# EAGLE board simon (EAGLE 6.4)
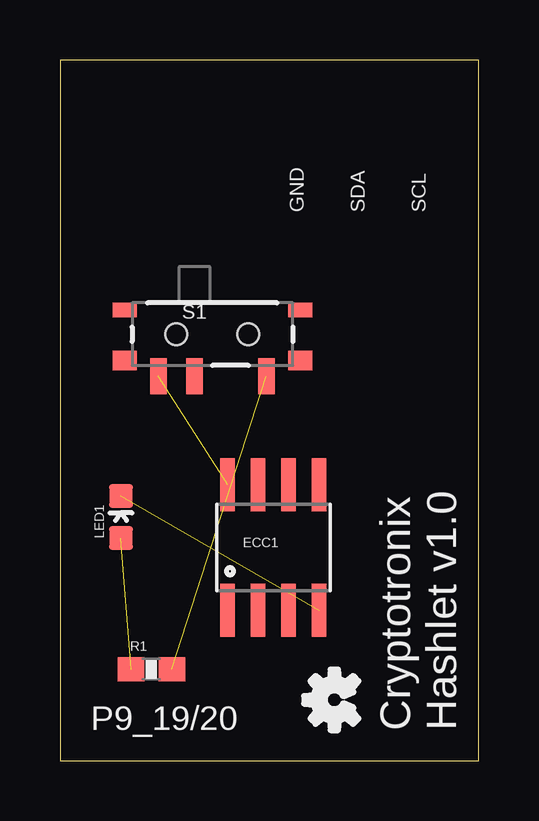
[diagram p0: board, top side]

Size 17.45 x 29.2 mm. Coordinates in mm from the lower left corner, seen from the top.
Outline: 0,0 17.45,0 17.45,29.2 0,29.2 0,0
Copper layers (1*16): Top 0.0356mm / dielectric 1.5011mm / Bottom 0.0356mm
Design rules "LaenPCBOrder": minimum track width 6mil, minimum drill 13mil, track to track 6mil, track to pad 6mil, pad to pad 6mil, via to via 6mil, smd to smd 6mil, copper to edge 15mil, drill to drill 6mil, minimum pad ring 7mil, minimum via ring 7mil, stop-mask expansion 3mil, vias tented up to drill 0mil, thermal gap 10mil

## Footprints (pad centres in the part's own frame; a part is rotated, then mirrored left to right if it is on the bottom)
SOIC8 = smd 0.61 x 2.21: 1 -1.905,-2.616; 2 -0.635,-2.616; 3 0.635,-2.616; 4 1.905,-2.616; 5 1.905,2.616; 6 0.635,2.616; 7 -0.635,2.616; 8 -1.905,2.616
LED-0603 = smd 1 x 1: A 0,-0.877; C 0,0.877
0603-RES = smd 1.1 x 1: 1 -0.85,0; 2 0.85,0
SWITCH-SPST-SMD-A = smd 0.7 x 1.5: 1 -2.25,-1.75; 2 -0.75,-1.75; 3 2.25,-1.75 | smd 1 x 0.6: GND1 -3.65,1; GND3 3.65,1 | smd 1 x 0.8: GND2 -3.65,-1.1; GND4 3.65,-1.1 | hole 0.9: -1.5,0; 1.5,0

## Placement (x,y rotation side)
ECC1  ATECC108  [SOIC8]  8.89,8.89 0 top
FRAME1  FRAME-LETTER  [CREATIVE_COMMONS]  20.32,-7.62 0 top  (outside the outline)
LED1  [LED-0603]  2.54,10.16 0 top
R1  [0603-RES]  3.81,3.81 0 top
S1  [SWITCH-SPST-SMD-A]  6.35,17.78 0 top

## Library data of the parts
ECC1 = cryptotronix
FRAME1 = SparkFun-Aesthetics
LED1 = SparkFun-LED
R1 = SparkFun-Resistors
S1 = SparkFun-Electromechanical

## Nets
ECC_VCC: ECC1.8 S1.1
GND: ECC1.4 LED1.C
N$4: LED1.A R1.1
PWR_RM_GPIO: R1.2 S1.3
SCL: ECC1.6
SDA: ECC1.5
VCC: S1.2

## Tracks (layer width: path | path; a pad name or v marks a point on that pad's centre or on a via)
ECC_VCC  (1 unrouted)
GND  (1 unrouted)
N$3
  Top 0.254: 12.24,2.87 arc9 12.17,3 12.43,3.32 12.21,3.54 11.89,3.28 arc19 11.63,3.39 11.59,3.8 11.28,3.8 11.23,3.39 arc19 10.97,3.28 10.65,3.54 10.43,3.32 10.69,3 arc19 10.58,2.74 10.17,2.69 10.17,2.38 10.58,2.34 arc19 10.69,2.08 10.43,1.76 10.65,1.54 10.97,1.8 arc19 11.23,1.69 11.28,1.28 11.59,1.28 11.63,1.69 arc19 11.89,1.8 12.21,1.54 12.43,1.76 12.17,2.08 arc9 12.24,2.21 11.8,2.39 arc-68 11.43,2.14 arc-247 11.8,2.69 12.24,2.87
N$4  (1 unrouted)
PWR_RM_GPIO  (1 unrouted)

## Text on the board
tPlace: GND | SDA | SCL | P9_19/20 | Cryptotronix / Hashlet v1.0